# Altium PCB PCB_Course_Mitr.PcbDoc
Units mm, origin at the board's own origin, x right, y up, seen from the top; angles counter-clockwise.
Board outline 110 x 90 mm, 2 copper layers (Top Layer, Bottom Layer), stack 1.57 mm thick; 38 components, 62 nets, 171 pads, 86 vias.
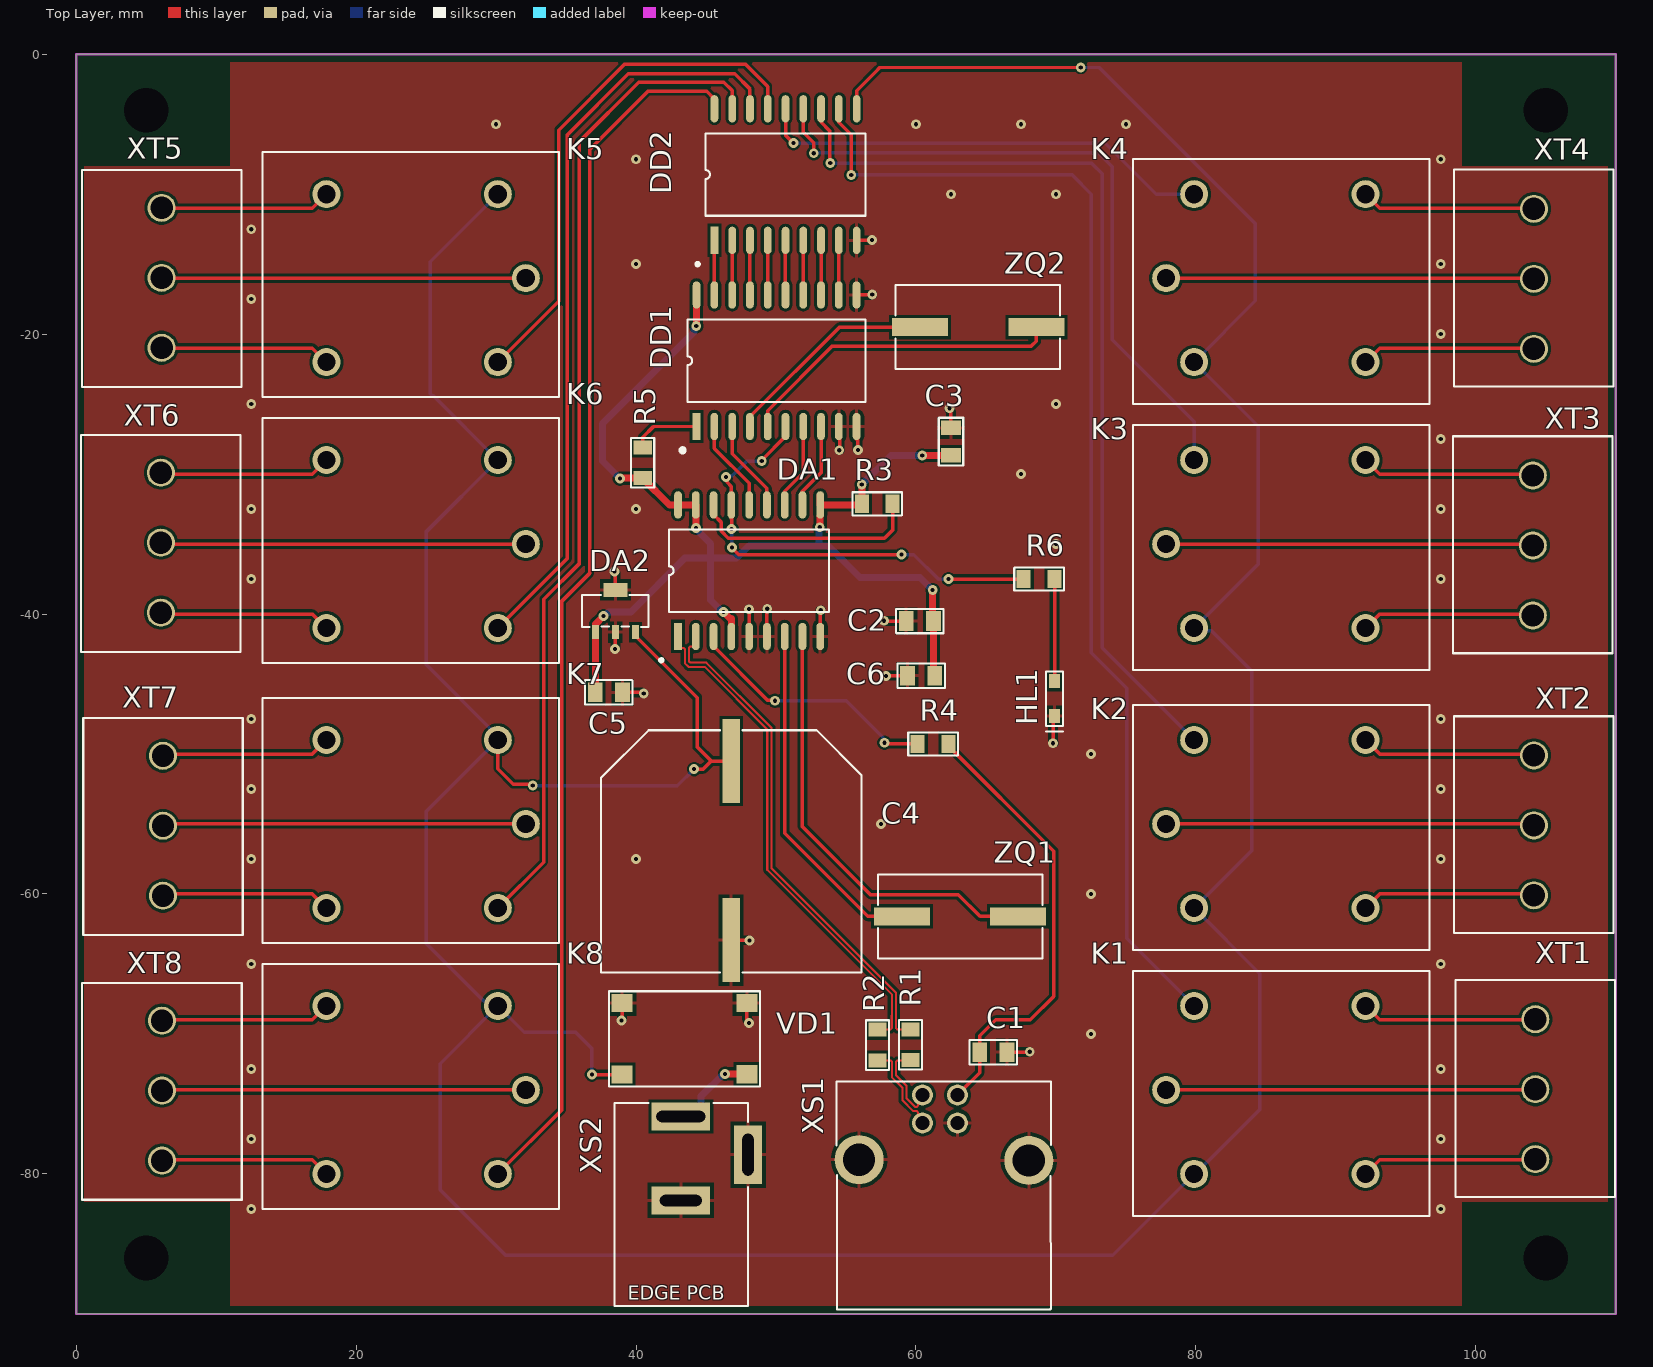
[diagram p0: Top Layer view]
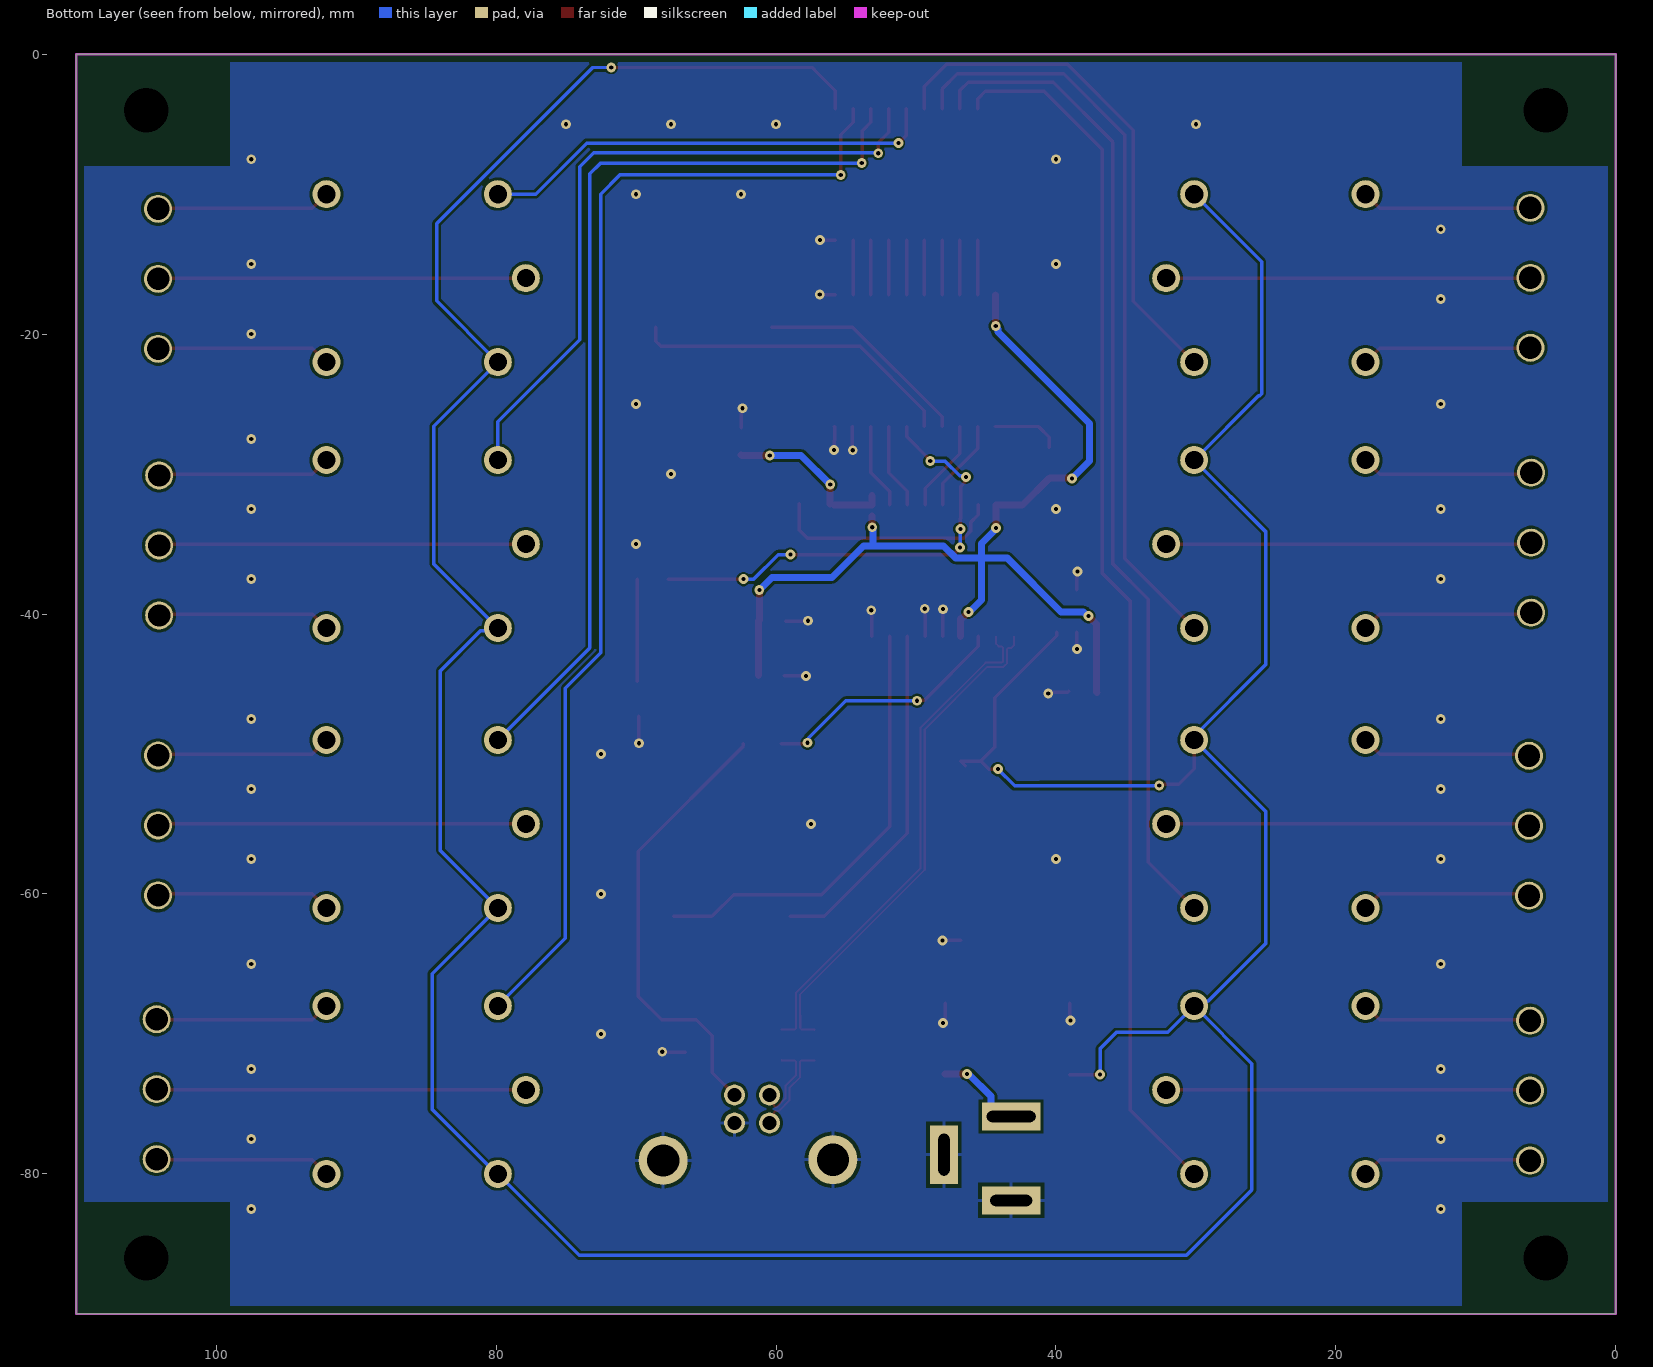
[diagram p1: Bottom Layer view, seen from below]
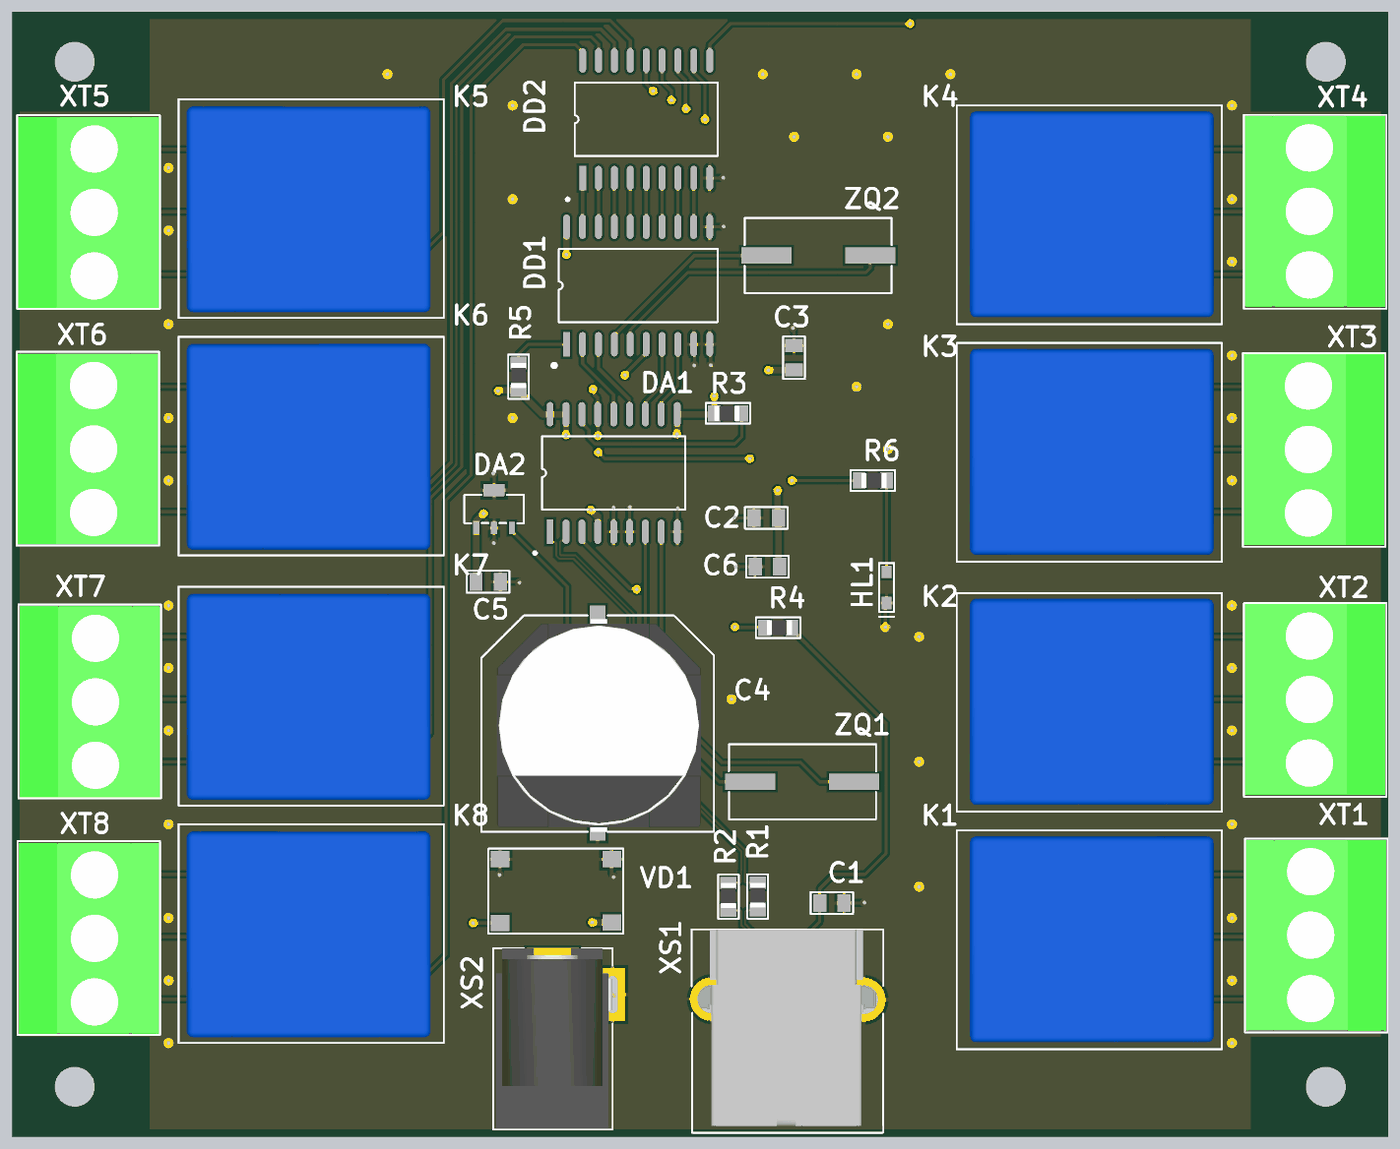
[diagram p2: 3D render of the assembled board from above, using the file's embedded part models]

## Layer stack, top to bottom
Top Solder: solder mask 0.01, Solder Resist, Dk 3.5
Top Layer: signal copper 0.035
Dielectric 1: dielectric 1.5, FR-4, Dk 4.6
Bottom Layer: signal copper 0.035
Bottom Solder: solder mask 0.01, Solder Resist, Dk 3.5

## Board outline
0,0 0,-90 110,-90 110,0

## Design rules (kind name [scope] priority, off if disabled: settings)
AcuteAngle [All] p1: minimum=6.00000000000000E+0001 checktracksonly=FALSE
Clearance Clearance_KeepOutLayer [OnLayer('Keep-Out Layer')] p1: gap=0.5 ignorepadtopadclearanceinfootprint=FALSE except(0: Arc-Hole Track-Hole SMDPad-Hole THPad-Hole Via-Hole Fill-Hole Poly-Hole Region-Hole Text-Hole)
Clearance [All] p2: gap=0.15 ignorepadtopadclearanceinfootprint=FALSE except(0: Arc-Hole Track-Hole SMDPad-Hole THPad-Hole Via-Hole Fill-Hole Poly-Hole Region-Hole Text-Hole; 0.2: Track-Fill Track-Poly Track-Region SMDPad-Fill SMDPad-Poly SMDPad-Region THPad-Fill THPad-Poly THPad-Region Fill-Fill Fill-Poly Fill-Region Poly-Poly Poly-Region Region-Region)
ComponentClearance [All] p1: gap=0.2 collisioncheckmode=3 verticalgap=0.2 showdistances=FALSE
DiffPairsRouting DiffPairsRouting_USB [InDifferentialPair('USB0') or InDifferentialPair('USB1')] p1: maxlimit=0.15 minlimit=0.15 mostfreqgap=0.15 toplayer_minwidth=0.15 toplayer_maxwidth=0.15 toplayer_prefwidth=0.15 bottomlayer_minwidth=0.15 bottomlayer_maxwidth=0.15 bottomlayer_prefwidth=0.15 maxuncoupledlength=10
HoleSize [All] p1: absolutevalues=TRUE maxlimit=3.6 minlimit=0.3 maxpercent=80.000 minpercent=20.000
HoleToHoleClearance [All] p1: gap=0.3 allowstackedmicrovias=TRUE
MatchedLengths [InDifferentialPair('USB0') Or InDifferentialPair('USB1')] p1: tolerance=1.905 checknetsindiffpair=TRUE checkdiffpairvsdiffpair=FALSE checkxsignals=FALSE checkothers=FALSE
MinimumAnnularRing [All] p1: minimumring=0.2
MinimumSolderMaskSliver [All] p1: minsoldermaskwidth=0.15
PolygonConnect PolygonConnect_Via [IsVia] p1: connectstyle=Direct reliefconductorwidth=0.254 reliefentries=4 polygonreliefangle="90 Angle" airgapwidth=0.254
PolygonConnect [All] p2: connectstyle=Relief reliefconductorwidth=0.25 reliefentries=4 polygonreliefangle="90 Angle" airgapwidth=0.25
RoutingVias [All] p1: holewidth=0.4 width=0.9 viastyle="Through Hole" minholewidth=0.3 minwidth=0.7 maxholewidth=0.5 maxwidth=1.1
SMDEntry [All] p1: side=TRUE corner=TRUE anyangle=TRUE
SMDNeckDown [All] p1: percent=100.000
SMDToCorner [All] p1: distance=0
SMDToPlane [All] p1: distance=0
SilkToSilkClearance [All] p1: silktosilkclearance=0
SilkToSolderMaskClearance [IsPad] p1: minsilkscreentomaskgap=0 clearancetoexposedcopper=FALSE
SolderMaskExpansion [All] p1: expansion=0.05 istentingtop=FALSE
Width [All] p1: maxlimit=5 minlimit=0.15 preferedwidth=0.25
23 further rules are at their usual default settings.

## Classes and differential pairs
net class C[8..1]: C1 C2 C3 C4 C5 C6 C7 C8
differential pair USB1: +USB1_P -USB1_N
differential pair USB0: +USB0_P -USB0_N

## Components (designator, comment, footprint, x,y, rotation, side; value= is the part's Value field where it differs from the comment)
C1 "0,1 мкФ" 0805_CAP 66.499,-71.3 r180 top
C2 "0,1 мкФ" 0805_CAP 59.299,-40.5 r0 top
C3 "0,1 мкФ" 0805_CAP 62.499,-26.7 r270 top
C4 "2200 мкФ" Pol_CAP 46.799,-50.5 r0 top
C5 "0,1 мкФ" 0805_CAP 39.024,-45.6 r180 top
C6 "0,1 мкФ" 0805_CAP 59.399,-44.4 r0 top
DA1 "MT8870DS" CM8870C-SOP18 42.999,-41.6 r90 top
DA2 "78L05" STU 37.099,-41.3 r0 top
DD1 "ATtiny2313" ATtiny2313-SOP20 44.324,-26.6 r90 top
DD2 "ULN2803A" ULN2803-SOP18 45.599,-13.3 r90 top
HL1 "Красный" Blink_RED 69.899,-47.3 r90 top
K1 "LEG-12" LEG-12 84.999,-74 r180 top
K2 "LEG-12" LEG-12 84.999,-55 r180 top
K3 "LEG-12" LEG-12 84.999,-35 r180 top
K4 "LEG-12" LEG-12 84.999,-16 r180 top
K5 "LEG-12" LEG-12 24.999,-16 r0 top
K6 "LEG-12" LEG-12 24.999,-35 r0 top
K7 "LEG-12" LEG-12 24.999,-55 r0 top
K8 "LEG-12" LEG-12 24.999,-74 r0 top
R1 "100 кОм" 0805_RES 59.599,-69.675 r270 top
R2 "100 кОм" 0805_RES 57.249,-69.7 r270 top
R3 "300 кОм" 0805_RES 56.125,-32.125 r0 top
R4 "100 кОм" 0805_RES 62.324,-49.275 r180 top
R5 "10 кОм" 0805_RES 40.477,-28.096 r270 top
R6 "1 кОм" 0805_RES 69.899,-37.5 r180 top
VD1 "DF04S" Diode_Bridge 38.999,-67.8 r270 top
XS1 "USB_TypeB" "USB-B TE Connectivity 292304-1" 61.999,-76.7 r0 top
XS2 "DJK-02B" DJK-02B 45.599,-78.9 r270 top
XT1 "KLS2" pad 104.25,-78.95 r90 top
XT2 "KLS2" pad 104.15,-60.1 r90 top
XT3 "KLS2" pad 104.075,-40.1 r90 top
XT4 "KLS2" pad 104.15,-21.05 r90 top
XT5 "KLS2" pad 6.1,-10.975 r270 top
XT6 "KLS2" pad 6.05,-29.9 r270 top
XT7 "KLS2" pad 6.2,-50.125 r270 top
XT8 "KLS2" pad 6.125,-69.05 r270 top
ZQ1 "" Quartz 67.299,-61.6 r180 top
ZQ2 "" Quartz 60.299,-19.5 r0 top

## Footprints (in the part's own frame and the unit in brackets; to place one, negate y for a bottom-side part, rotate by r counter-clockwise, add the part's x,y. Pads: shape width x height; smd on the part's side, far side on the other; paste and mask are expansions set on the pad)
0805_CAP [mm]
  rect 1.05x1.4 smd: 1(0,0) 2(1.95,0)
  silkscreen extent -0.72,-0.87 2.68,0.87
0805_RES [mm]
  rect 1x1.3 smd: 1(0,0) 2(2.2,0)
  silkscreen extent -0.67,-0.82 2.88,0.82, body extent 0,-0.6 2,0.6, height 0.5
ATtiny2313-SOP20 [mm]
  rect 1.95x0.55 smd: 1(0,0)
  oval 1.95x0.55 smd: 2(0,-1.27) 3(0,-2.54) 4(0,-3.81) 5(0,-5.08) 6(0,-6.35) 7(0,-7.62) 8(0,-8.89) 9(0,-10.16) 10(0,-11.43) 11(9.4,-11.43) 12(9.4,-10.16) 13(9.4,-8.89) 14(9.4,-7.62) 15(9.4,-6.35) 16(9.4,-5.08) 17(9.4,-3.81) 18(9.4,-2.54) 19(9.4,-1.27) 20(9.4,0)
  silkscreen extent -1.84,-12.06 7.64,1.14
Blink_RED [mm]
  rect 1x0.8 smd: A(2.5,0) K(0,0)
  silkscreen extent -1.1,-0.6 3.2,0.6
CM8870C-SOP18 [mm]
  rect 1.95x0.55 smd: 1(0,0)
  oval 1.95x0.55 smd: 2(0,-1.27) 3(0,-2.54) 4(0,-3.81) 5(0,-5.08) 6(0,-6.35) 7(0,-7.62) 8(0,-8.89) 9(0,-10.16) 10(9.4,-10.16) 11(9.4,-8.89) 12(9.4,-7.62) 13(9.4,-6.35) 14(9.4,-5.08) 15(9.4,-3.81) 16(9.4,-2.54) 17(9.4,-1.27) 18(9.4,0)
  silkscreen extent -1.8,-10.79 7.64,1.3
Diode_Bridge [mm]
  rect 1.3x1.5 smd: 1(0,0) 2(5.1,0) 3(5.075,8.925) 4(0,8.925)
  silkscreen extent -0.85,-0.92 5.95,9.85
DJK-02B [mm]
  rect 2x4.2 hole 0.8 slot 3.5 at 90 deg: 1(-3,-2.4)
  rect 4.2x2 hole 0.8 slot 3 at 0 deg: 2(-0.275,2.4)
  rect 2x4.2 hole 0.8 slot 3 at 90 deg: 3(3,-2.4)
  silkscreen extent -3.97,-7.15 10.53,2.4, body extent -3.97,-6.93 10.43,2.37, height 11
LEG-12 [mm]
  round 2 hole 1.3: 1(-7.125,6) 2(7.125,0) 3(-7.125,-6) 4(5.125,6) 5(5.125,-6)
  silkscreen extent -11.7,-8.5 9.5,9, body extent -11.05,-8.05 8.45,8.45, height 16.5
pad [mm]
  round 2 hole 1.6: 1(0,0) 2(5,0) 3(10,0)
  silkscreen extent -2.7,-5.7 12.8,5.7, body extent -2.54,-5.6 12.7,5.6, height 18
Pol_CAP [mm]
  rect 1.25x6 smd: 1(0,0) 2(0,-12.8)
  silkscreen extent -9.3,-15.1 9.3,2.2, body extent -8.05,-15.1 8.25,1.9, height 16.5
Quartz [mm]
  rect 4x1.3 smd: 1(0,0) 2(8.3,0)
  silkscreen extent -1.75,-3 10,3
STU [mm]
  rect 0.5x1 smd: 1(0,0) 2(1.425,0) 3(2.85,0)
  rect 1.7x1 smd: 2(1.425,3.025)
  silkscreen extent -0.95,0.38 3.8,2.65
ULN2803-SOP18 [mm]
  rect 1.95x0.55 smd: 1(0,0)
  oval 1.95x0.55 smd: 2(0,-1.27) 3(0,-2.54) 4(0,-3.81) 5(0,-5.08) 6(0,-6.35) 7(0,-7.62) 8(0,-8.89) 9(0,-10.16) 10(9.4,-10.16) 11(9.4,-8.89) 12(9.4,-7.62) 13(9.4,-6.35) 14(9.4,-5.08) 15(9.4,-3.81) 16(9.4,-2.54) 17(9.4,-1.27) 18(9.4,0)
  silkscreen extent -1.8,-10.79 7.64,1.3
"USB-B TE Connectivity 292304-1" [mm]
  round 3.5 hole 2.3: 0(-6.062,-2.287) 0(6.062,-2.337)
  round 1.5 hole 1: 1(0.962,2.338) 2(-1.538,2.338) 3(-1.538,0.337) 4(0.962,0.337)
  silkscreen extent -7.69,-12.99 7.64,3.29, body extent -7.31,-12.44 7.08,3.26, height 11.6

## Part data
C1 C2 C3 C5 C6: library part Capacitor
C4: library part Capacitor_pol
DA2: library part STU
HL1: library part Led_red
K1 K2 K3 K4 K5 K6 K7 K8: library part Relay
R1 R2 R3 R4 R5 R6: library part Resistor
VD1: library part Diode_bridge
XS2: library part DJK-02B_PWR_CON
XT1 XT2 XT3 XT4 XT5 XT6 XT7 XT8: library part pad
ZQ1 ZQ2: library part Quartz

## Free pads (board coordinates)
  round 0 hole 3.2 unplated: 0(5,-86) 0(5,-4) 0(105,-86) 0(105,-4)

## Via types
v1: diameter 0.7, hole 0.3, Top Layer to Bottom Layer, 69 vias
v2: diameter 0.7, hole 0.3, Top Layer to Bottom Layer, tented both sides, 17 vias

## Nets (pads, with @x,y where several pads share a name; then routed paths per layer and width w, separated by ;. In a path a pad name is that pad's centre, name@x,y a point inside that pad or via, vN(x,y) a via of type N, cw(c..) or ccw(c..) an arc to the next point about the centre after c; other vN are vias at no path point)
+5В: C2.2 C3.2 C5.2 C6.2 DA1.4 DA1.10 DA1.17 DA1.18 DA2.1 DD1.20 R3.1 R5.2 | length 86
  Top Layer w0.5: C5.2 37.099,-45.575 DA2.1 37.099,-40.726 v1(37.675,-40.15) ; v1(38.85,-30.325) 38.879,-30.296 R5.2 42.381,-32.2 DA1.18 DA1.17 44.275,-32.206 v1(44.275,-33.85) ; v1(44.3,-19.425) 44.3,-17.224 DD1.20 ; v1(46.25,-39.85) 46.725,-40.325 46.809,-40.325 DA1.4 ; v1@53.159,-33.765 DA1.10@53.159,-32.982 ; DA1.10@53.159,-31.514 DA1.10 R3.1@55.874,-32.2 ; R3.1 v1(56.125,-30.75) ; v1(60.45,-28.675) 62.474,-28.675 C3.2 ; v1(61.19,-38.292) 61.19,-40.442 C2.2 C6.2@61.249,-44.4
  Bottom Layer w0.5: v1(37.675,-40.15) 37.729,-40.15 38.029,-39.85 39.625,-39.85 43.475,-36 45.317,-36 ; v1(38.85,-30.325) 37.6,-29.075 37.6,-26.4 44.15,-19.85 44.15,-19.629 44.3,-19.479 v1(44.3,-19.425) ; v1(44.275,-33.85) 44.275,-33.925 45.317,-34.967 45.317,-36 ; v1(46.25,-39.85) 46.196,-39.85 46.096,-39.75 46.075,-39.75 45.317,-38.992 45.317,-36 ; 53.085,-35.1 53.085,-33.838 v1(53.124,-33.8) ; v1(56.125,-30.75) 58.2,-28.675 v1(60.45,-28.675) ; v1(61.19,-38.292) 60.273,-37.375 56,-37.375 53.75,-35.125 48.034,-35.125 47.159,-36 45.317,-36
C1: DD2.11 K1.5 | length 83.9
  Top Layer w0.25: DD2.11 54.489,-4.875 55.374,-5.76 v1(55.374,-8.625)
  Bottom Layer w0.25: v1(55.374,-8.625) 71.149,-8.625 72.524,-10 72.524,-42.775 75.049,-45.3 75.049,-63.175 K1.5
C2: DD2.12 K2.5 | length 67.1
  Top Layer w0.25: DD2.12 53.219,-4.875 53.824,-5.48 53.824,-7.725 v1(53.874,-7.775)
  Bottom Layer w0.25: v1(53.874,-7.775) 72.524,-7.775 73.299,-8.55 73.299,-42.425 K2.5
C3: DD2.13 K3.5 | length 48.6
  Top Layer w0.25: DD2.13 51.949,-5.575 52.699,-6.325 v1(52.699,-7.075)
  Bottom Layer w0.25: v1(52.699,-7.075) 52.724,-7.05 73.024,-7.05 74.024,-8.05 74.024,-20.4 79.874,-26.25 K3.5
C4: DD2.14 K4.5 | length 32.8
  Top Layer w0.25: DD2.14 50.679,-5.78 v1(51.249,-6.35)
  Bottom Layer w0.25: v1(51.249,-6.35) 73.524,-6.35 77.174,-10 K4.5
C5: DD2.15 K5.5 | length 37.5
  Top Layer w0.25: K5.5 34.474,-17.65 34.474,-5.425 39.199,-0.7 47.799,-0.7 49.409,-2.31 DD2.15
C6: DD2.16 K6.5 | length 54
  Top Layer w0.25: K6.5 35.099,-36.025 35.099,-5.75 39.449,-1.4 47.049,-1.4 48.139,-2.49 DD2.16
C7: DD2.17 K7.5 | length 71.4
  Top Layer w0.25: K7.5 33.399,-57.725 33.399,-38.95 35.924,-36.425 35.924,-6.275 40.199,-2 46.274,-2 46.869,-2.595 DD2.17
C8: DD2.18 K8.5 | length 87.5
  Top Layer w0.25: K8.5 34.674,-75.45 34.674,-39.1 36.674,-37.1 36.674,-6.825 40.849,-2.65 45.049,-2.65 45.599,-3.2 DD2.18
GND: C1.1 C2.1 C3.1 C4.2 C5.1 C6.1 DA1.5 DA1.6 DA1.9 DA2.2 DD1.9 DD1.10 DD1.11 DD2.9 HL1.K VD1.1 VD1.4 XS1.0 XS1.4 XS2.2 XS2.3 | length 28
  Top Layer w0.25: v2(38.449,-36.95) 38.524,-37.025 DA2.2@38.524,-38.275 ; v2(38.499,-42.5) 38.524,-42.475 DA2.2@38.524,-41.3 ; v2(38.949,-69.05) 38.999,-69 VD1.1 ; C5.1@39.074,-45.525 39.149,-45.6 40.474,-45.6 v2(40.549,-45.675) ; C4.2 48.074,-63.3 v2(48.099,-63.325) ; VD1.4 47.924,-68.953 48.074,-69.103 v2(48.074,-69.225) ; XS2.2 XS2.2@48.124,-78.75 ; v2(48.074,-39.65) 48.079,-39.655 DA1.5 ; DA1.6 49.349,-39.65 v2(49.374,-39.625) ; DA1.9 53.159,-39.765 v2(53.199,-39.725) ; v2(54.524,-28.3) 54.559,-28.265 54.559,-27.587 54.541,-27.57 54.541,-26.618 DD1.9@54.559,-26.6 ; DD1.11 56.849,-17.2 v2(56.874,-17.175) ; DD2.9 56.824,-13.3 v2(56.849,-13.275) ; DD1.10@55.829,-26.6 55.811,-26.618 55.811,-27.57 55.829,-27.587 55.829,-28.255 v2(55.849,-28.275) ; v2(57.724,-40.475) 57.749,-40.5 C2.1 ; v2(57.849,-44.425) 57.874,-44.4 C6.1 ; v2(62.399,-25.3) 62.399,-25.422 62.499,-25.522 C3.1 ; C1.1 68.099,-71.3 v2(68.124,-71.275) ; HL1.K@69.799,-47.3 v1(69.799,-49.225) v1@69.849,-49.225
  other v1: 12.5,-82.5 97.5,-82.5 12.5,-77.5 97.5,-77.5 12.5,-72.5 97.5,-72.5 72.5,-70 12.5,-65 97.5,-65 72.5,-60 12.5,-57.5 40,-57.5 97.5,-57.5 57.5,-55 12.5,-52.5 97.5,-52.5 72.5,-50 12.5,-47.5 97.5,-47.5 12.5,-37.5 97.5,-37.5 70,-35 12.5,-32.5 40,-32.5 97.5,-32.5 67.5,-30 97.5,-27.5 12.5,-25 70,-25 97.5,-20 12.5,-17.5 40,-15 97.5,-15 12.5,-12.5 62.5,-10 70,-10 40,-7.5 97.5,-7.5 30,-5 60,-5 67.5,-5 75,-5
NetC1_2: C1.2 R4.1 XS1.1 | length 32.5
  Top Layer w0.25: R4.1 62.324,-49.425 69.849,-56.95 69.849,-67.325 68.174,-69 65.691,-69 64.549,-70.143 64.549,-72.775 XS1.1
NetC4_1: C4.1 DA2.3 DD2.10 K1.4 K2.4 K3.4 K4.4 K5.4 K6.4 K7.4 K8.4 VD1.2 | length 304.4
  Top Layer w0.25: K7.4 30.124,-51.05 31.224,-52.15 32.252,-52.15 32.266,-52.164 32.537,-52.164 v1(32.624,-52.25) ; v1(36.849,-72.9) VD1.2 ; DA2.3 39.949,-41.55 44.374,-45.975 44.374,-49.5 45.374,-50.5 ; v1(44.149,-51.075) 44.799,-51.075 45.374,-50.5 ; C4.1@46.472,-50.827 C4.1 45.374,-50.5 ; DD2.10 55.759,-2.615 57.124,-1.25 57.424,-0.95 v1(71.774,-0.95)
  Bottom Layer w0.25: K5.4 25.299,-14.825 25.299,-24.254 25.445,-24.4 25.524,-24.4 K6.4 25.024,-34.1 25.024,-43.625 30.124,-48.725 K7.4 25.024,-54.1 25.024,-63.55 29.139,-67.665 29.789,-67.665 K8.4 ; v1(32.624,-52.25) 41.149,-52.25 41.174,-52.275 42.949,-52.275 v1(44.149,-51.075) ; v1(36.849,-72.9) 36.849,-71.05 35.674,-69.875 31.999,-69.875 K8.4 ; v1(71.774,-0.95) 73.099,-0.95 84.249,-12.1 84.249,-17.625 K4.4 84.449,-26.575 84.449,-36.425 K3.4 80.052,-41.179 81.102,-41.179 83.974,-44.05 83.974,-56.9 K2.4 84.574,-65.7 84.574,-75.4 79.974,-80 K1.4 74.049,-85.825 30.674,-85.825 25.999,-81.15 25.999,-72.125 K8.4
NetDA1_3: DA1.3 R4.2 | length 17.8
  Top Layer w0.25: DA1.3 45.539,-42.3 49.389,-46.15 49.874,-46.15 v1(49.924,-46.2) ; v1(57.749,-49.2) 57.799,-49.25 59.624,-49.25
  Bottom Layer w0.25: v1(49.924,-46.2) 55.024,-46.2 57.662,-48.839 57.662,-49.114 v1(57.749,-49.2)
NetDA1_7: DA1.7 ZQ1.2 | length 24.9
  Top Layer w0.25: DA1.7 50.619,-55.67 56.549,-61.6 ZQ1.2
NetDA1_8: DA1.8 ZQ1.1 | length 31.7
  Top Layer w0.25: DA1.8 51.889,-55.19 56.749,-60.05 63.024,-60.05 64.574,-61.6 ZQ1.1
NetDA1_11: DA1.11 DD1.8 | length 6.1
  Top Layer w0.25: DA1.11 51.889,-31.225 53.214,-29.9 DD1.8
NetDA1_12: DA1.12 DD1.7 | length 6.1
  Top Layer w0.25: DA1.12 50.619,-31.225 51.944,-29.9 DD1.7
NetDA1_13: DA1.13 DD1.3 | length 6.6
  Top Layer w0.25: DD1.3 46.864,-28.54 49.349,-31.025 DA1.13
NetDA1_14: DA1.14 DD1.2 | length 6.6
  Top Layer w0.25: DD1.2 45.594,-28.17 48.079,-30.655 DA1.14
NetDA1_15: DA1.15 DD1.6 R6.2 | length 33.2
  Top Layer w0.25: v1(46.424,-30.2) 46.51,-30.286 46.51,-30.589 46.809,-30.888 46.809,-33.175 46.824,-33.19 v1(46.824,-33.925) ; v1(46.849,-35.25) 47.349,-35.75 v1(58.974,-35.75) ; v1(48.974,-29.075) 48.974,-29 50.674,-27.3 DD1.6 ; v1(62.324,-37.5) R6.2
  Bottom Layer w0.25: v1(46.424,-30.2) 46.499,-30.125 46.874,-30.125 47.924,-29.075 v1(48.974,-29.075) ; v1(46.824,-33.925) 46.849,-33.95 v1(46.849,-35.25) ; v1(58.974,-35.75) 59.849,-35.75 61.599,-37.5 v1(62.324,-37.5)
NetDA1_16: DA1.16 R3.2 | length 16.7
  Top Layer w0.25: DA1.16 45.539,-32.9 46.101,-33.462 46.101,-34.086 46.59,-34.575 55.138,-34.575 55.15,-34.575 57.75,-34.575 58.325,-34 R3.2
NetDD1_1: DD1.1 R5.1 | length 4.9
  Top Layer w0.25: R5.1@40.474,-28.1 R5.1 40.477,-27.371 41.249,-26.6 DD1.1
NetDD1_4: DD1.4 ZQ2.1 | length 15.5
  Top Layer w0.25: DD1.4 48.134,-25.9 54.534,-19.5 ZQ2.1
NetDD1_5: DD1.5 ZQ2.2 | length 23.4
  Top Layer w0.25: DD1.5 49.404,-25.47 54.024,-20.85 68.249,-20.85 68.599,-20.5 ZQ2.2
NetDD1_12: DD1.12 DD2.8 | length 3.9
  Top Layer w0.25: DD1.12 54.484,-16.225 54.489,-16.22 DD2.8
NetDD1_13: DD1.13 DD2.7 | length 3.9
  Top Layer w0.25: DD1.13 53.214,-16.225 53.219,-16.22 DD2.7
NetDD1_14: DD1.14 DD2.6 | length 3.9
  Top Layer w0.25: DD1.14@51.949,-17.195 DD2.6
NetDD1_15: DD1.15 DD2.5 | length 3.9
  Top Layer w0.25: DD1.15 DD2.5@50.674,-13.305
NetDD1_16: DD1.16 DD2.4 | length 3.9
  Top Layer w0.25: DD1.16 49.404,-13.305 DD2.4
NetDD1_17: DD1.17 DD2.3 | length 3.9
  Top Layer w0.25: DD1.17 48.134,-16.225 48.139,-16.22 DD2.3
NetDD1_18: DD1.18 DD2.2 | length 3.9
  Top Layer w0.25: DD1.18 46.864,-16.225 46.869,-16.22 DD2.2
NetDD1_19: DD1.19 DD2.1 | length 3.9
  Top Layer w0.25: DD1.19 45.594,-16.225 45.599,-16.22 DD2.1
NetHL1_A: HL1.A R6.1 | length 7.3
  Top Layer w0.25: HL1.A R6.1
NetK1_1: K1.1 XT1.1 | length 13.3
  Top Layer w0.25: K1.1 93.124,-79 XT1.1@104.999,-79
NetK1_2: K1.2 XT1.2 | length 27.1
  Top Layer w0.25: K1.2 XT1.2@104.999,-74
NetK1_3: K1.3 XT1.3 | length 13.3
  Top Layer w0.25: K1.3 93.124,-69 XT1.3@104.999,-69
NetK2_1: K2.1 XT2.1 | length 13.3
  Top Layer w0.25: K2.1 93.124,-60 XT2.1@104.999,-60
NetK2_2: K2.2 XT2.2 | length 27.1
  Top Layer w0.25: K2.2 XT2.2@104.999,-55
NetK2_3: K2.3 XT2.3 | length 13.3
  Top Layer w0.25: K2.3 93.124,-50 XT2.3@104.999,-50
NetK3_1: K3.1 XT3.1 | length 12.4
  Top Layer w0.25: K3.1 93.124,-40 XT3.1@104.075,-40
NetK3_2: K3.2 XT3.2 | length 26.2
  Top Layer w0.25: K3.2 XT3.2@104.075,-35
NetK3_3: K3.3 XT3.3 | length 12.4
  Top Layer w0.25: K3.3 93.124,-30 XT3.3@104.075,-30
NetK4_1: K4.1 XT4.1 | length 13.3
  Top Layer w0.25: K4.1 93.124,-21 XT4.1@104.999,-21
NetK4_2: K4.2 XT4.2 | length 27.1
  Top Layer w0.25: K4.2 XT4.2@104.999,-16
NetK4_3: K4.3 XT4.3 | length 13.3
  Top Layer w0.25: K4.3 93.124,-11 XT4.3@104.999,-11
NetK5_1: K5.1 XT5.1 | length 12.2
  Top Layer w0.25: XT5.1@6.1,-11 16.874,-11 K5.1
NetK5_2: K5.2 XT5.2 | length 26
  Top Layer w0.25: XT5.2@6.1,-16 K5.2
NetK5_3: K5.3 XT5.3 | length 12.2
  Top Layer w0.25: XT5.3@6.1,-21 16.874,-21 K5.3
NetK6_1: K6.1 XT6.1 | length 12.2
  Top Layer w0.25: XT6.1@6.05,-30 16.874,-30 K6.1
NetK6_2: K6.2 XT6.2 | length 26.1
  Top Layer w0.25: XT6.2@6.05,-35 K6.2
NetK6_3: K6.3 XT6.3 | length 12.2
  Top Layer w0.25: XT6.3@6.05,-40 16.874,-40 K6.3
NetK7_1: K7.1 XT7.1 | length 12.1
  Top Layer w0.25: XT7.1@6.2,-50 16.874,-50 K7.1
NetK7_2: K7.2 XT7.2 | length 25.9
  Top Layer w0.25: XT7.2@6.2,-55 K7.2
NetK7_3: K7.3 XT7.3 | length 12.1
  Top Layer w0.25: XT7.3@6.2,-60 16.874,-60 K7.3
NetK8_1: K8.1 XT8.1 | length 12.2
  Top Layer w0.25: XT8.1@6.125,-69 16.874,-69 K8.1
NetK8_2: K8.2 XT8.2 | length 26
  Top Layer w0.25: XT8.2@6.125,-74 K8.2
NetK8_3: K8.3 XT8.3 | length 12.2
  Top Layer w0.25: XT8.3@6.125,-79 16.874,-79 K8.3
NetVD1_3: VD1.3 XS2.1 | length 8.2
  Top Layer w0.5: XS2.1 43.906,-75.9 XS2.1@44.656,-75.15 ; v1(46.363,-72.854) 47.902,-72.854 VD1.3
  Bottom Layer w0.5: XS2.1 43.906,-75.9 44.656,-75.15 44.656,-74.443 46.207,-72.892 46.325,-72.892 v1(46.363,-72.854)
USB0_N: R1.2 XS1.2 | length 6
  Top Layer w0.15: R1.2 59.574,-71.9 58.667,-71.9 58.579,-71.988 58.579,-72.967 59.336,-73.725 59.336,-74.616 59.932,-75.212 60.056,-75.212 60.144,-75.125 60.144,-75.045 60.461,-74.728 XS1.2
USB0_P: R2.2 XS1.3 | length 6.5
  Top Layer w0.15: R2.2 58.191,-71.9 58.279,-71.988 58.279,-73.092 59.036,-73.849 59.036,-74.741 59.808,-75.512 60.056,-75.512 60.144,-75.6 60.144,-75.68 60.461,-75.997 XS1.3
USB1_N: DA1.2 R1.1 | length 36.2
  Top Layer w0.15: DA1.2 44.269,-42.125 44.084,-42.31 43.871,-42.31 43.784,-42.398 43.784,-43.387 43.871,-43.475 45.023,-43.475 49.674,-48.126 49.674,-58.15 58.574,-67.05 58.574,-68.798 58.568,-68.803 58.568,-69.587 58.656,-69.675 R1.1
USB1_P: DA1.1 R2.1 | length 36.2
  Top Layer w0.15: DA1.1 42.999,-42.227 43.199,-42.427 43.396,-42.427 43.484,-42.515 43.484,-43.511 43.747,-43.775 44.899,-43.775 49.374,-48.25 49.374,-58.274 58.274,-67.174 58.274,-68.674 58.268,-68.679 58.268,-69.587 58.181,-69.675 57.274,-69.675 R2.1

## Polygon pours and split planes (outlines as drawn)
GND on Bottom Layer "Bot Layer-GND" (solid, remove dead copper, pour order 0): 0,-8 11,-8 11,0 99,0 99,-8 110,-8 110,-82 99,-82 99,-90 11,-90 11,-82 0,-82
GND on Top Layer "Bot Layer-GND" (solid, remove dead copper, pour order 1): 0,-8 11,-8 11,0 99,0 99,-8 110,-8 110,-82 99,-82 99,-90 11,-90 11,-82 0,-82

## Keep-outs
Keep-Out Layer:
  the board outline again, w0.15

## Text inside footprints (layer, text, board x,y; h text height)
XS2: Top Overlay "EDGE PCB" at 39.399,-89 h1